# EAGLE board Hiveopolis (EAGLE 9.6.2)
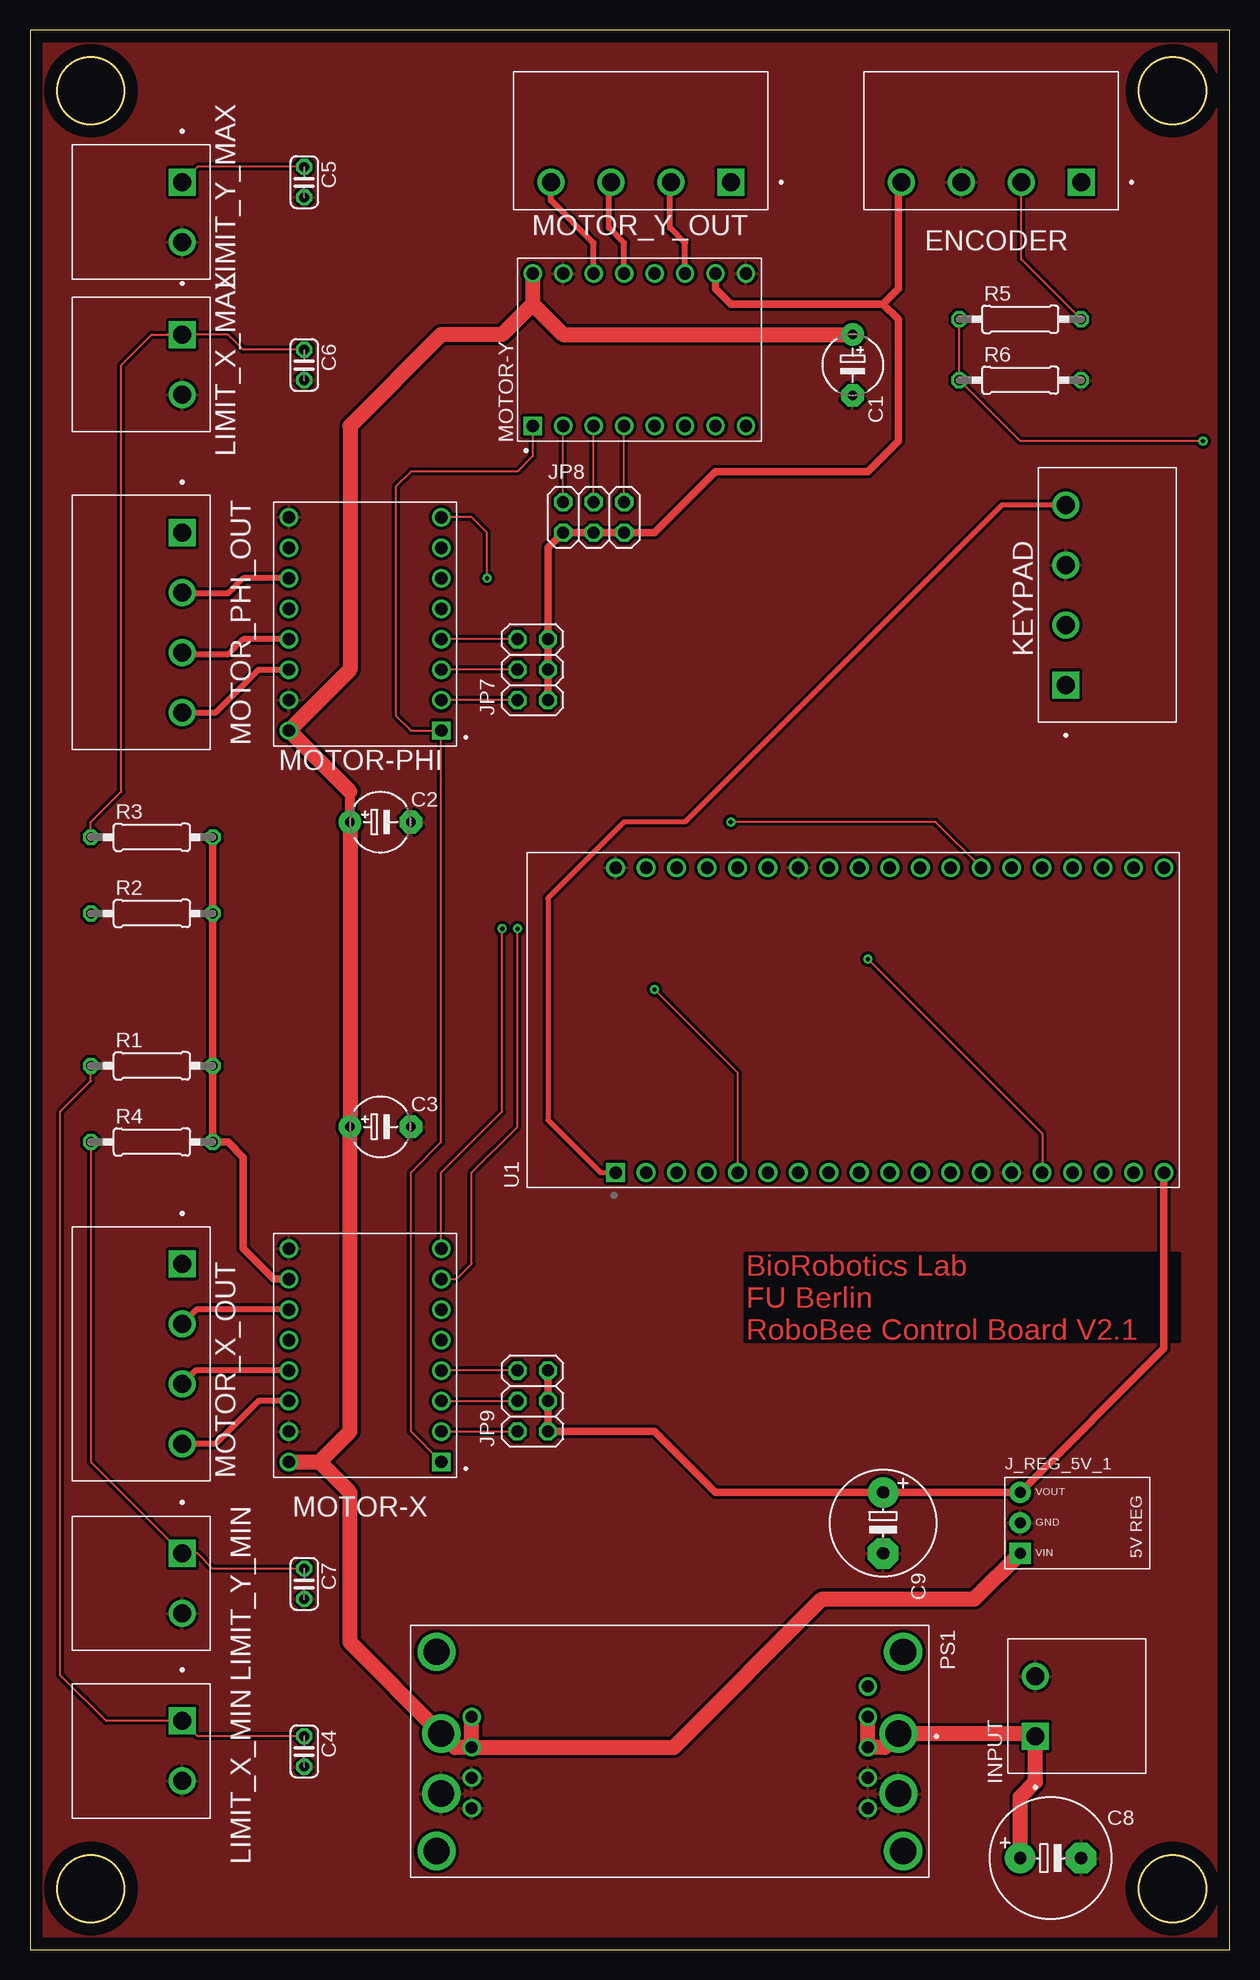
[diagram p0: board, top side]
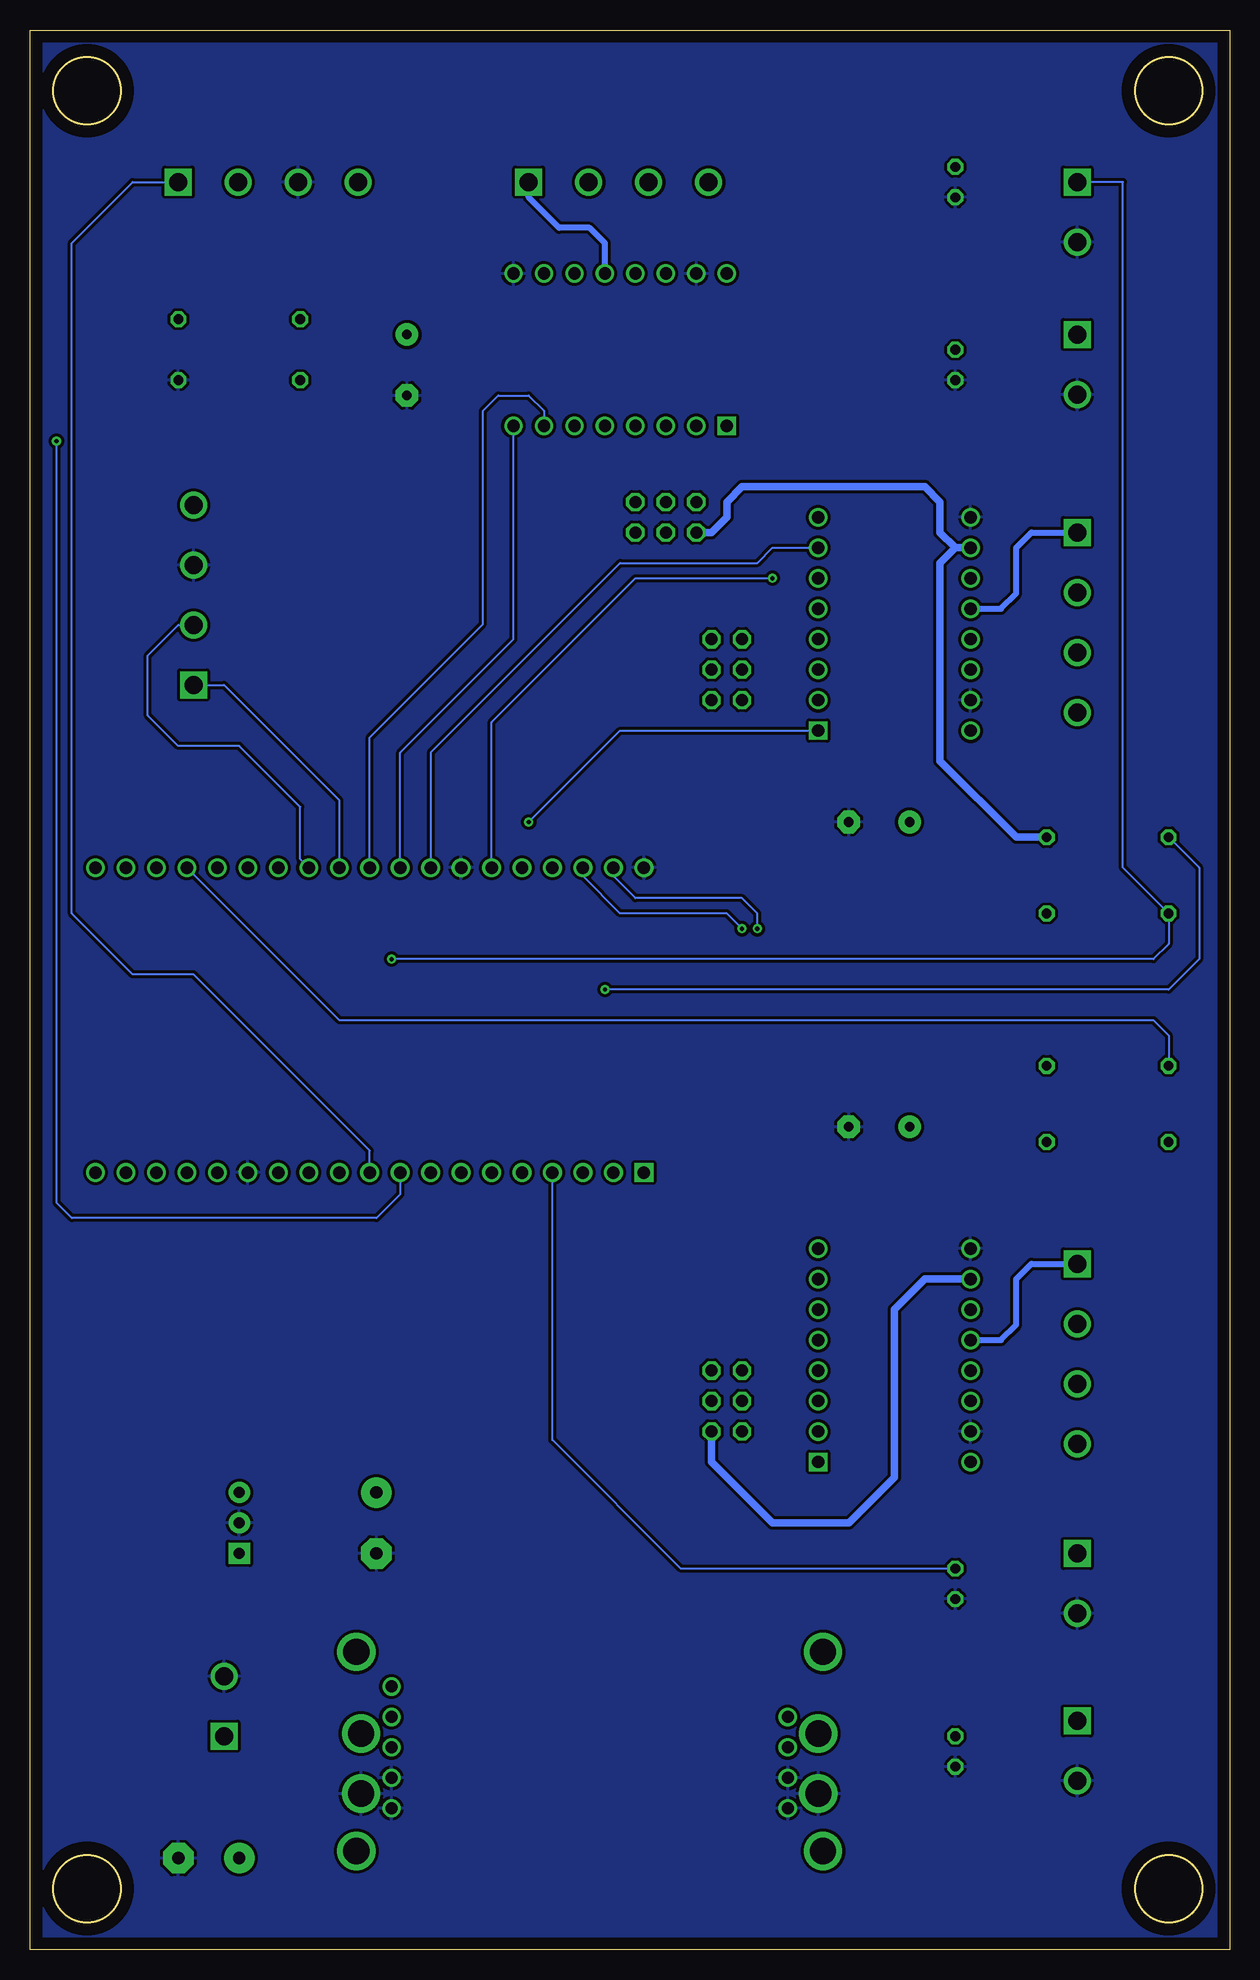
[diagram p1: board, bottom side, seen from below]

Size 100 x 160 mm. Coordinates in mm from the lower left corner, seen from the top.
Outline: 0,0 100,0 100,160 0,160 0,0
Outline: circle at 5.08,154.94 radius 2.8
Outline: circle at 95.25,154.94 radius 2.8
Outline: circle at 5.08,5.08 radius 2.8
Outline: circle at 95.25,5.08 radius 2.8
Copper layers (1*16): Top 0.035mm / dielectric 1.5mm / Bottom 0.035mm
Design rules "default": minimum track width 6mil, minimum drill 0.35mm, track to track 6mil, track to pad 6mil, pad to pad 6mil, via to via 6mil, smd to smd 6mil, copper to edge 40mil, drill to drill 6mil, minimum pad ring 10mil, minimum via ring 8mil, stop-mask expansion 4mil, vias tented up to drill 0mil, thermal gap 10mil

## Footprints (pad centres in the part's own frame; a part is rotated, then mirrored left to right if it is on the bottom)
E5-5 = drill 0.813 pad 1.905: + -2.54,0 | drill 0.813 pad 1.905 octagon: - 2.54,0
C025-024X044 = drill 0.813 octagon: 1 -1.27,0; 2 1.27,0
E5-10,5 = drill 1.016 pad 2.54: + -2.54,0 | drill 1.016 pad 2.54 octagon: - 2.54,0
E5-8,5 = drill 1.016 pad 2.54: + -2.54,0 | drill 1.016 pad 2.54 octagon: - 2.54,0
HDR-04/RA = drill 1.5 square: 1 0,0 | drill 1.5: 2 5,0; 3 10,0; 4 15,0
HDR-02/RA = drill 1.5 square: 1 0,0 | drill 1.5: 2 5,0
5V_VOLTAGE_REGULATOR = drill 0.9 pad 1.778: GND 0,-6.35; VOUT -2.54,-6.35 | drill 0.9 pad 1.778 square: VIN 2.54,-6.35
2X03 = drill 1.016 octagon: 1 -2.54,-1.27; 2 -2.54,1.27; 3 0,-1.27; 4 0,1.27; 5 2.54,-1.27; 6 2.54,1.27
MODULE_A4988_STEPPER_MOTOR_DRIVER_CARRIER = drill 1.02 square: 1 -6.35,8.89 | drill 1.02: 2 -6.35,6.35; 3 -6.35,3.81; 4 -6.35,1.27; 5 -6.35,-1.27; 6 -6.35,-3.81; 7 -6.35,-6.35; 8 -6.35,-8.89; 9 6.35,-8.89; 10 6.35,-6.35; 11 6.35,-3.81; 12 6.35,-1.27; 13 6.35,1.27; 14 6.35,3.81; 15 6.35,6.35; 16 6.35,8.89
CONV_S18V20X = drill 2.18: 1 -1.49,19.06; 2 3.51,19.06; 3 -1.49,-19.06; 4 3.51,-19.06; S1 8.3,19.45; S2 8.3,-19.45; S3 -8.3,-19.45; S4 -8.3,19.45 | drill 1.02: 5 -5.42,16.52; 6 -2.88,16.52; 7 -0.34,16.52; 8 2.2,16.52; 9 4.74,16.52; 10 -2.88,-16.52; 11 -0.34,-16.52; 12 2.2,-16.52; 13 4.74,-16.52
0207/10 = drill 0.813 octagon: 1 -5.08,0; 2 5.08,0
MODULE_ESP32-DEVKITC-32D = drill 1.04 square: 1 -12.7,19.76 | drill 1.04: 2 -12.7,17.22; 3 -12.7,14.68; 4 -12.7,12.14; 5 -12.7,9.6; 6 -12.7,7.06; 7 -12.7,4.52; 8 -12.7,1.98; 9 -12.7,-0.56; 10 -12.7,-3.1; 11 -12.7,-5.64; 12 -12.7,-8.18; 13 -12.7,-10.72; 14 -12.7,-13.26; 15 -12.7,-15.8; 16 -12.7,-18.34; 17 -12.7,-20.88; 18 -12.7,-23.42; 19 -12.7,-25.96; 20 12.7,19.76; 21 12.7,17.22; 22 12.7,14.68; 23 12.7,12.14; 24 12.7,9.6; 25 12.7,7.06; 26 12.7,4.52; 27 12.7,1.98; 28 12.7,-0.56; 29 12.7,-3.1; 30 12.7,-5.64; 31 12.7,-8.18; 32 12.7,-10.72; 33 12.7,-13.26; 34 12.7,-15.8; 35 12.7,-18.34; 36 12.7,-20.88; 37 12.7,-23.42; 38 12.7,-25.96

## Placement (x,y rotation side)
C1  100µF  [E5-5]  68.58,132.08 270 top
C2  100µF  [E5-5]  29.21,93.98 0 top
C3  100µF  [E5-5]  29.21,68.58 0 top
C4  100nF  [C025-024X044]  22.86,16.51 270 top
C5  100nF  [C025-024X044]  22.86,147.32 270 top
C6  100nF  [C025-024X044]  22.86,132.08 270 top
C7  100nF  [C025-024X044]  22.86,30.48 270 top
C8  1000µF  [E5-10,5]  85.09,7.62 0 top
C9  220µF  [E5-8,5]  71.12,35.56 270 top
ENCODER  S4B-XH-A(LF)(SN)  [HDR-04/RA]  87.63,147.32 180 top
INPUT  S2B-XH-A(LF)(SN)  [HDR-02/RA]  83.82,17.78 90 top
J_REG_5V_1  5V_VOLTAGE_REGULATOR  [5V_VOLTAGE_REGULATOR]  88.9,35.56 270 top
JP7  [2X03]  41.91,106.68 90 top
JP8  [2X03]  46.99,119.38 0 top
JP9  [2X03]  41.91,45.72 90 top
KEYPAD  S4B-XH-A(LF)(SN)  [HDR-04/RA]  86.36,105.41 90 top
LIMIT_X_MAX  S2B-XH-A(LF)(SN)  [HDR-02/RA]  12.7,134.62 270 top
LIMIT_X_MIN  S2B-XH-A(LF)(SN)  [HDR-02/RA]  12.7,19.05 270 top
LIMIT_Y_MAX  S2B-XH-A(LF)(SN)  [HDR-02/RA]  12.7,147.32 270 top
LIMIT_Y_MIN  S2B-XH-A(LF)(SN)  [HDR-02/RA]  12.7,33.02 270 top
MOTOR-PHI  A4988_STEPPER_MOTOR_DRIVER_CARRIER  [MODULE_A4988_STEPPER_MOTOR_DRIVER_CARRIER]  27.94,110.49 180 top
MOTOR-X  A4988_STEPPER_MOTOR_DRIVER_CARRIER  [MODULE_A4988_STEPPER_MOTOR_DRIVER_CARRIER]  27.94,49.53 180 top
MOTOR-Y  A4988_STEPPER_MOTOR_DRIVER_CARRIER  [MODULE_A4988_STEPPER_MOTOR_DRIVER_CARRIER]  50.8,133.35 90 top
MOTOR_PHI_OUT  S4B-XH-A(LF)(SN)  [HDR-04/RA]  12.7,118.11 270 top
MOTOR_X_OUT  S4B-XH-A(LF)(SN)  [HDR-04/RA]  12.7,57.15 270 top
MOTOR_Y_OUT  S4B-XH-A(LF)(SN)  [HDR-04/RA]  58.42,147.32 180 top
PS1  S18V20X  [CONV_S18V20X]  53.34,16.51 270 top
R1  4.7kΩ  [0207/10]  10.16,73.66 0 top
R2  4.7kΩ  [0207/10]  10.16,86.36 0 top
R3  4.7kΩ  [0207/10]  10.16,92.71 0 top
R4  4.7kΩ  [0207/10]  10.16,67.31 0 top
R5  4.7kΩ  [0207/10]  82.55,135.89 0 top
R6  4.7kΩ  [0207/10]  82.55,130.81 0 top
U1  ESP32-DEVKITC-32D  [MODULE_ESP32-DEVKITC-32D]  68.58,77.47 90 top

## Library data of the parts
C1-C9 = rcl; SPICEPREFIX: C
ENCODER KEYPAD MOTOR_PHI_OUT MOTOR_X_OUT MOTOR_Y_OUT = Connectors; CREATED_BY: PCBLayout.com; DIGIKEY_PART_NUMBER: 455-2243-ND; MANUFACTURER: JST Sales America Inc.; MPN: S4B-XH-A(LF)(SN)
INPUT LIMIT_X_MAX LIMIT_X_MIN LIMIT_Y_MAX LIMIT_Y_MIN = Connectors; CREATED_BY: praked; MANUFACTURER: METZ Connect; MPN: PT11502HBBN
J_REG_5V_1 = Pololu Voltage Regulators
JP7-JP9 = pinhead
MOTOR-PHI MOTOR-X MOTOR-Y = A4988_STEPPER_MOTOR_DRIVER_CARRIER; AVAILABILITY: No availability data; DESCRIPTION: Stepper Motor Driver; MF: Pololu; MP: A4988 STEPPER MOTOR DRIVER CARRIER; PACKAGE: None; PRICE: None
PS1 = S18V20X; AVAILABILITY: Not in stock; DESCRIPTION: Step-up/Step-Down Voltage Regulators; MF: Pololu; MP: S18V20x; PACKAGE: Package; PRICE: None
R1-R6 = rcl; SPICEPREFIX: R
U1 = ESP32-DEVKITC-32D; AVAILABILITY: In Stock; DESCRIPTION: WiFi Development Tools (802.11) ESP32 General Development Kit, ESP32-WROOM-32D on the board; MF: Espressif Systems; MP: ESP32-DEVKITC-32D; PACKAGE: None; PRICE: None; PURCHASE-URL: https://pricing.snapeda.com/search/part/ESP32-DEVKITC-32D/?ref=eda

## Nets
+5V: C9.+ ENCODER.4 J_REG_5V_1.VOUT JP7.1 JP7.3 JP7.5 JP8.1 JP8.3 JP8.5 JP9.1 JP9.3 JP9.5 MOTOR-PHI.10 MOTOR-X.10 MOTOR-Y.10 R1.2 R2.2 R3.2 R4.2 U1.19
+24V: C1.+ C2.+ C3.+ J_REG_5V_1.VIN MOTOR-PHI.16 MOTOR-X.16 MOTOR-Y.16 PS1.3 PS1.10 PS1.11
GND: C1.- C2.- C3.- C4.2 C5.2 C6.2 C7.2 C8.- C9.- ENCODER.3 INPUT.2 J_REG_5V_1.GND KEYPAD.3 LIMIT_X_MAX.2 LIMIT_X_MIN.2 LIMIT_Y_MAX.2 LIMIT_Y_MIN.2 MOTOR-PHI.9 MOTOR-PHI.15 MOTOR-X.9 MOTOR-X.15 MOTOR-Y.9 MOTOR-Y.15 PS1.2 PS1.4 PS1.8 PS1.9 PS1.12 PS1.13 R6.2 U1.14 U1.20 U1.26
N$1: MOTOR-X.7 U1.22
N$2: MOTOR-X.8 U1.21
N$3: ENCODER.1 U1.10
N$4: JP9.2 MOTOR-X.2
N$5: MOTOR-PHI.8 U1.25
N$6: MOTOR-Y.7 U1.29
N$7: C5.1 LIMIT_Y_MAX.1 R2.1 U1.15
N$8: MOTOR-PHI.7 U1.27
N$9: MOTOR-X.12 MOTOR_X_OUT.1
N$10: MOTOR-X.11 MOTOR_X_OUT.2
N$11: MOTOR-X.13 MOTOR_X_OUT.3
N$12: MOTOR-X.14 MOTOR_X_OUT.4
N$13: JP9.4 MOTOR-X.3
N$14: JP9.6 MOTOR-X.4
N$15: JP7.2 MOTOR-PHI.2
N$16: JP7.4 MOTOR-PHI.3
N$17: MOTOR-PHI.12 MOTOR_PHI_OUT.1
N$18: MOTOR-PHI.11 MOTOR_PHI_OUT.2
N$19: MOTOR-PHI.13 MOTOR_PHI_OUT.3
N$20: MOTOR-PHI.14 MOTOR_PHI_OUT.4
N$21: MOTOR-Y.12 MOTOR_Y_OUT.1
N$22: MOTOR-Y.11 MOTOR_Y_OUT.2
N$23: MOTOR-Y.13 MOTOR_Y_OUT.3
N$24: MOTOR-Y.14 MOTOR_Y_OUT.4
N$25: JP7.6 MOTOR-PHI.4
N$26: JP8.2 MOTOR-Y.2
N$27: C6.1 LIMIT_X_MAX.1 R3.1 U1.5
N$28: ENCODER.2 R5.2
N$29: KEYPAD.1 U1.30
N$30: C7.1 LIMIT_Y_MIN.1 R4.1 U1.4
N$31: JP8.4 MOTOR-Y.3
N$32: JP8.6 MOTOR-Y.4
N$33: KEYPAD.2 U1.31
N$34: KEYPAD.4 U1.1
N$35: C4.1 LIMIT_X_MIN.1 R1.1 U1.35
N$37: MOTOR-PHI.1 MOTOR-X.1 MOTOR-Y.1 U1.32
N$38: R5.1 R6.1 U1.9
N$39: C8.+ INPUT.1 PS1.1 PS1.6 PS1.7
N$41: MOTOR-Y.8 U1.28

## Tracks (layer width: path | path; a pad name or v marks a point on that pad's centre or on a via)
+5V
  Top 0.61: JP9.5 JP9.3 JP9.1 52.07,43.18 57.15,38.1 C9.+ J_REG_5V_1.VOUT 94.54,50.09 U1.19 | JP7.1 JP7.3 JP7.5 43.18,116.84 JP8.1 JP8.3 JP8.5 52.07,118.11 57.15,123.19 69.85,123.19 72.39,125.73 72.39,135.89 71.12,137.16 | MOTOR-Y.10 57.15,138.43 58.42,137.16 71.12,137.16 | MOTOR-X.10 20.32,55.88 17.78,58.42 17.78,66.04 16.51,67.31 R4.2 R1.2 R2.2 R3.2 | ENCODER.4 72.39,147.08 72.39,138.43 71.12,137.16
  Bottom 0.61: 22.86,116.84 24.13,118.11 24.13,120.65 25.4,121.92 40.64,121.92 41.91,120.65 41.91,119.38 43.18,118.11 JP8.1 | JP9.1 43.18,40.64 38.1,35.56 31.75,35.56 27.94,39.37 27.94,53.34 25.4,55.88 MOTOR-X.10 | 22.86,116.84 24.13,115.57 24.13,99.06 17.78,92.71 R3.2 | 22.86,116.84 MOTOR-PHI.10
+24V
  Top 0.305: 35.43,16.85 PS1.3
  Top 0.813: C2.+ 26.67,96.52
  Top 1.27: PS1.11 35.43,16.85 | PS1.11 PS1.10 | PS1.3 26.67,25.61 26.67,38.1 24.13,40.64 | C2.+ C3.+ 26.67,43.18 24.13,40.64 | 41.91,137.16 44.45,134.62 C1.+ | MOTOR-Y.16 41.91,137.16 | 41.91,137.16 39.37,134.62 34.29,134.62 26.67,127 26.67,106.68 MOTOR-PHI.16 26.67,96.52 | MOTOR-X.16 24.13,40.64 | J_REG_5V_1.VIN 78.74,29.21 66.04,29.21 53.68,16.85 PS1.11
GND
  pour Top (isolate 0.254): 0,160.02 100.33,160.02 100.33,0 0,0
  pour Bottom (isolate 0.254): 0,160.02 100.33,160.02 100.33,0 0,0
N$1  (via drill 0.35)
  Top 0.152: v40.64,85.09 40.64,68.58 36.83,64.77 36.83,57.15 35.56,55.88 MOTOR-X.7
  Bottom 0.152: v40.64,85.09 41.91,86.36 50.8,86.36 53.9,89.46 U1.22
N$2  (via drill 0.35)
  Top 0.152: v39.37,85.09 39.37,69.85 34.29,64.77 MOTOR-X.8
  Bottom 0.152: v39.37,85.09 39.37,86.36 40.64,87.63 49.53,87.63 51.36,89.46 U1.21
N$3
  Bottom 0.152: U1.10 71.68,66.6 86.36,81.28 91.44,81.28 96.52,86.36 96.52,142.24 91.44,147.32 ENCODER.1
N$4
  Top 0.152: MOTOR-X.2 JP9.2
N$5  (via drill 0.35)
  Top 0.152: v38.1,114.3 38.1,118.11 36.83,119.38 MOTOR-PHI.8
  Bottom 0.152: U1.25 61.52,102.31 49.53,114.3 v38.1,114.3
N$6
  Bottom 0.152: U1.29 71.68,101.04 62.23,110.49 62.23,128.27 60.96,129.54 58.42,129.54 57.15,128.27 MOTOR-Y.7
N$7  (via drill 0.35)
  Top 0.152: LIMIT_Y_MAX.1 13.97,148.59 C5.1 | v69.85,82.55 84.38,68.02 U1.15
  Bottom 0.152: LIMIT_Y_MAX.1 8.89,147.32 8.89,90.17 R2.1 5.08,83.82 6.35,82.55 v69.85,82.55
N$8
  Bottom 0.152: U1.27 66.6,99.77 50.8,115.57 39.37,115.57 38.1,116.84 MOTOR-PHI.7
N$9
  Bottom 0.508: MOTOR-X.12 19.05,50.8 17.78,52.07 17.78,55.88 16.51,57.15 MOTOR_X_OUT.1
N$10
  Top 0.508: MOTOR_X_OUT.2 13.89,53.34 MOTOR-X.11
N$11
  Top 0.508: MOTOR_X_OUT.3 13.81,48.26 MOTOR-X.13
N$12
  Top 0.508: MOTOR-X.14 19.05,45.72 15.48,42.15 MOTOR_X_OUT.4
N$13
  Top 0.152: MOTOR-X.3 JP9.4
N$14
  Top 0.152: JP9.6 MOTOR-X.4
N$15
  Top 0.152: JP7.2 MOTOR-PHI.2
N$16
  Top 0.152: JP7.4 MOTOR-PHI.3
N$17
  Bottom 0.508: MOTOR-PHI.12 19.05,111.76 17.78,113.03 17.78,116.84 16.51,118.11 MOTOR_PHI_OUT.1
N$18
  Top 0.152: 12.78,113.03 MOTOR_PHI_OUT.2
  Top 0.508: MOTOR-PHI.11 17.78,114.3 16.51,113.03 12.78,113.03
N$19
  Top 0.152: 12.86,107.95 MOTOR_PHI_OUT.3
  Top 0.508: MOTOR-PHI.13 17.78,109.22 16.51,107.95 12.86,107.95
N$20
  Top 0.508: MOTOR_PHI_OUT.4 15.48,103.11 19.05,106.68 MOTOR-PHI.14
N$21  (via drill 0.35)
  Bottom 0.508: MOTOR-Y.12 52.07,142.24 53.34,143.51 55.88,143.51 58.42,146.05 MOTOR_Y_OUT.1
  other vias: 58.42,147.32
N$22
  Top 0.152: 53.34,147.24 MOTOR_Y_OUT.2
  Top 0.508: MOTOR-Y.11 54.61,142.24 53.34,143.51 53.34,147.24
N$23
  Top 0.152: 48.26,147.16 MOTOR_Y_OUT.3
  Top 0.508: MOTOR-Y.13 49.53,142.24 48.26,143.51 48.26,147.16
N$24
  Top 0.508: MOTOR-Y.14 46.99,142.24 43.42,145.81 MOTOR_Y_OUT.4
N$25
  Top 0.152: JP7.6 MOTOR-PHI.4
N$26
  Top 0.152: JP8.2 MOTOR-Y.2
N$27  (via drill 0.35)
  Top 0.152: C6.1 17.78,133.35 16.51,134.62 LIMIT_X_MAX.1 | LIMIT_X_MAX.1 11.43,134.62 | R3.1 5.08,93.98 7.62,96.52 7.62,132.08 10.16,134.62 LIMIT_X_MAX.1 | v52.07,80.01 58.98,73.1 U1.5
  Bottom 0.152: R3.1 2.54,90.17 2.54,82.55 5.08,80.01 v52.07,80.01
N$28
  Top 0.152: R5.2 82.63,140.89 ENCODER.2
N$29
  Bottom 0.152: KEYPAD.1 83.82,105.41 74.22,95.81 U1.30
N$30
  Top 0.152: C7.1 15.24,31.75 13.97,33.02 LIMIT_Y_MIN.1 5.08,40.64 R4.1
  Bottom 0.152: U1.4 56.44,42.47 45.72,31.75 C7.1
N$31
  Top 0.152: JP8.4 MOTOR-Y.3
N$32
  Top 0.152: JP8.6 MOTOR-Y.4
N$33
  Bottom 0.152: U1.31 77.47,90.88 77.47,95.25 82.55,100.33 87.63,100.33 90.17,102.87 90.17,107.87 87.63,110.41 KEYPAD.2
N$34
  Top 0.406: KEYPAD.4 81.04,120.41 54.61,93.98 49.53,93.98 43.18,87.63 43.18,69.14 47.55,64.77 U1.1
N$35
  Top 0.152: C4.1 13.97,17.78 LIMIT_X_MIN.1 6.35,19.05 2.54,22.86 2.54,69.85 5.08,72.39 R1.1
  Bottom 0.152: U1.35 74.22,77.47 6.35,77.47 5.08,76.2 R1.1
N$37  (via drill 0.35)
  Top 0.152: MOTOR-Y.1 41.91,124.46 40.64,123.19 31.75,123.19 30.48,121.92 30.48,102.87 31.75,101.6 MOTOR-PHI.1 34.29,67.31 31.75,64.77 31.75,43.18 MOTOR-X.1 | U1.32 75.49,93.98 v58.42,93.98
  Bottom 0.152: v58.42,93.98 50.8,101.6 MOTOR-PHI.1
N$38  (via drill 0.35)
  Top 0.152: v97.79,125.73 82.55,125.73 R6.1 R5.1
  Bottom 0.152: U1.9 69.14,62.94 71.12,60.96 96.52,60.96 97.79,62.23 v97.79,125.73
N$39
  Top 1.27: PS1.6 PS1.7 71.25,16.85 PS1.1 83.6,18 INPUT.1 83.82,13.97 82.55,12.7 C8.+
N$41
  Bottom 0.152: U1.28 69.14,99.77 59.69,109.22 MOTOR-Y.8

## Text on the board
Top: BioRobotics Lab / FU Berlin / RoboBee Control Board V2.1